# EAGLE board board (EAGLE 9.6.2)
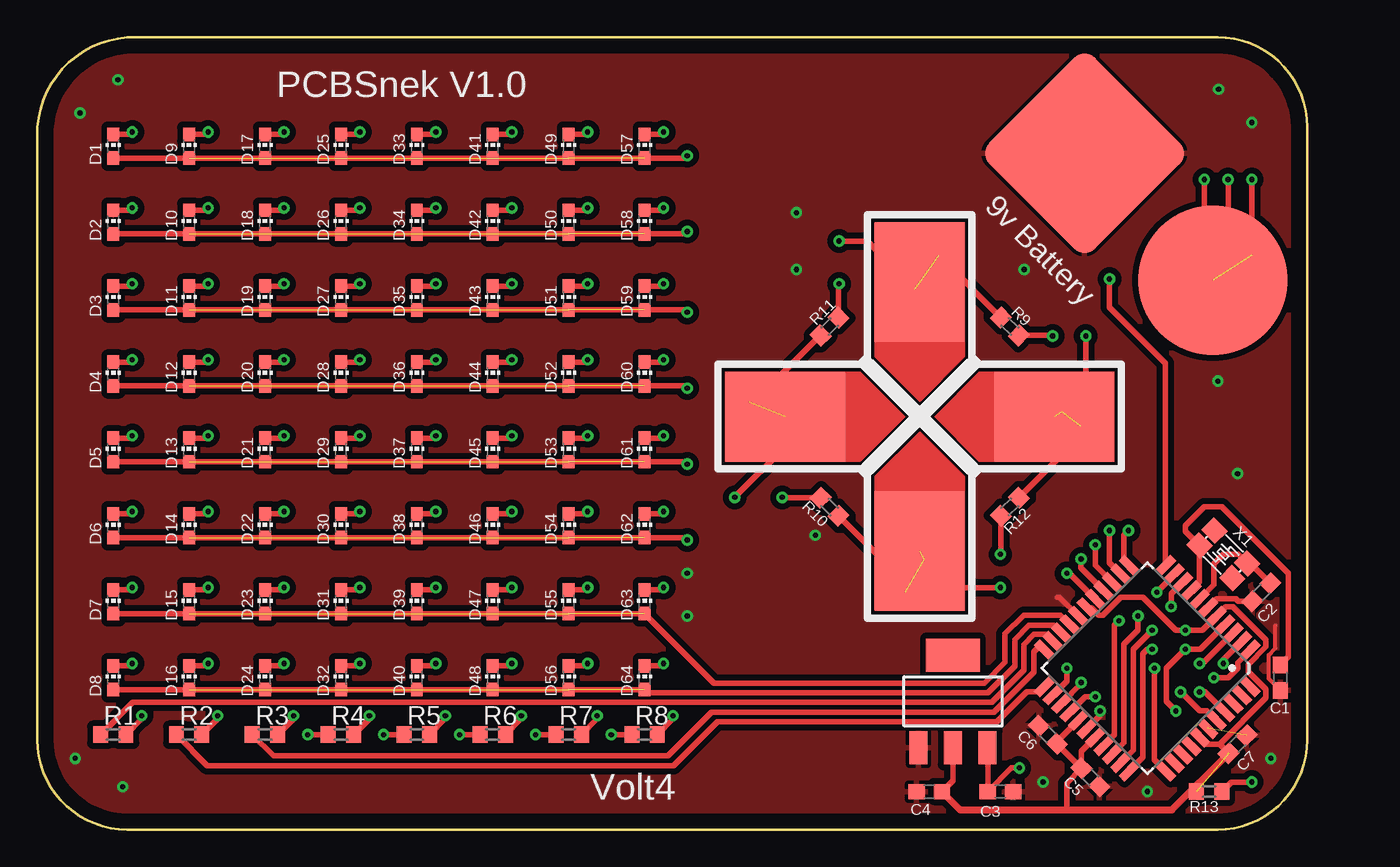
[diagram p0: board, top side]
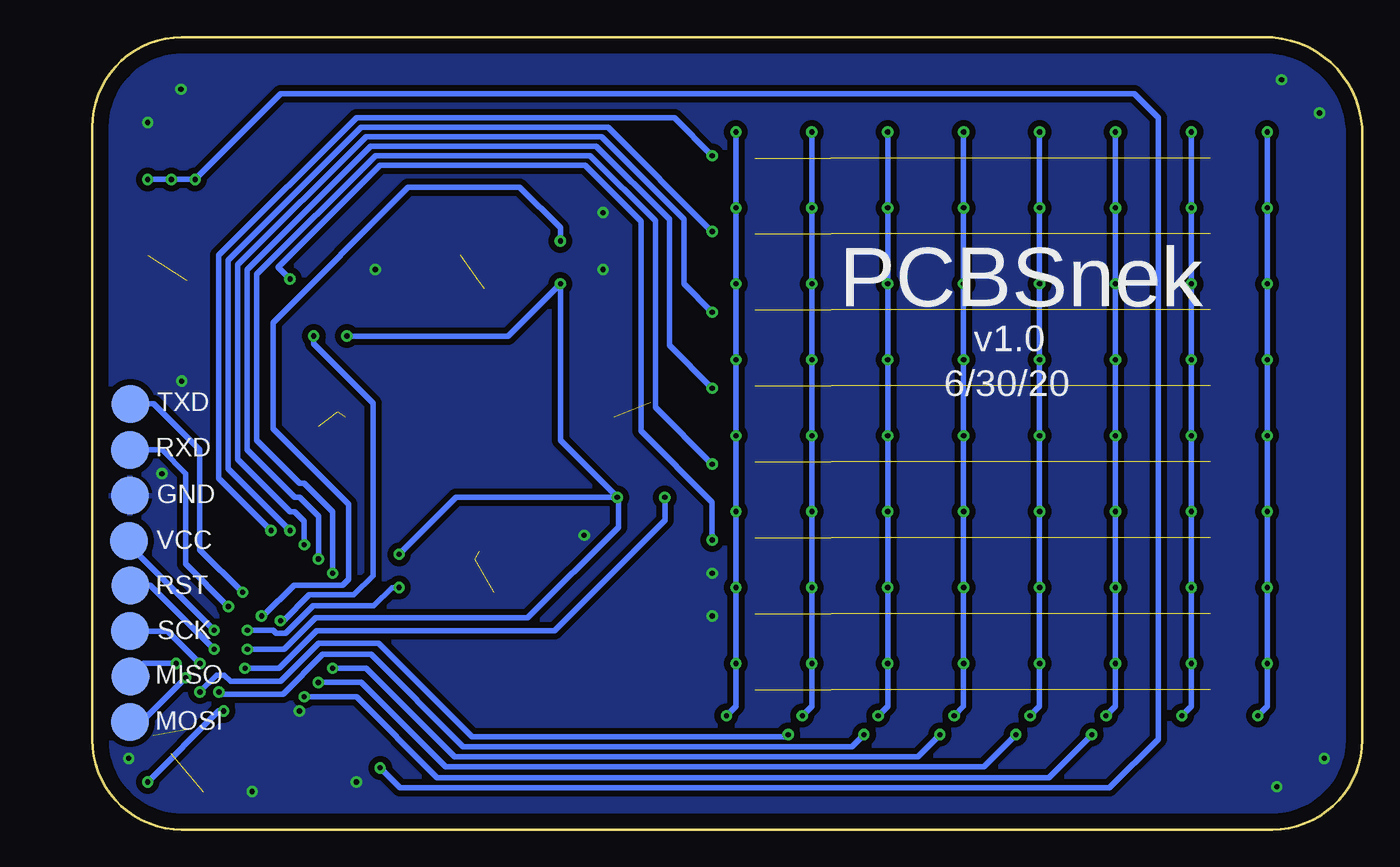
[diagram p1: board, bottom side, seen from below]

Size 85 x 53 mm. Coordinates in mm from the lower left corner, seen from the top.
Outline: 0,6 0,47 arc-81 6,53 79,53 arc-90 85,47 85,6 arc-90 79,0 6,0 arc-90 0,6
Copper layers (1*16): Top 0.035mm / dielectric 1.5mm / Bottom 0.035mm
Design rules "default": minimum track width 6mil, minimum drill 0.35mm, track to track 6mil, track to pad 6mil, pad to pad 6mil, via to via 6mil, smd to smd 6mil, copper to edge 40mil, drill to drill 6mil, minimum pad ring 10mil, minimum via ring 8mil, stop-mask expansion 4mil, vias tented up to drill 0mil, thermal gap 10mil

## Footprints (pad centres in the part's own frame; a part is rotated, then mirrored left to right if it is on the bottom)
SOT223 = smd 1.219 x 2.235: 1 -2.311,-3.099; 2 0,-3.099; 3 2.311,-3.099 | smd 3.6 x 2.2: 4 0,3.099
C0603 = smd 1.1 x 1: 1 -0.85,0; 2 0.85,0
LED_CHIP-LED0603MP = smd 0.8 x 0.9: A 0,-0.794; C 0,0.794
B2,54 = smd 2.54 x 2.54: TP 0,0
QFP44_10X10_0.80 = smd 1.5 x 0.55: 1 -5.7,4; 2 -5.7,3.2; 3 -5.7,2.4; 4 -5.7,1.6; 5 -5.7,0.8; 6 -5.7,0; 7 -5.7,-0.8; 8 -5.7,-1.6; 9 -5.7,-2.4; 10 -5.7,-3.2; 11 -5.7,-4; 23 5.7,-4; 24 5.7,-3.2; 25 5.7,-2.4; 26 5.7,-1.6; 27 5.7,-0.8; 28 5.7,0; 29 5.7,0.8; 30 5.7,1.6; 31 5.7,2.4; 32 5.7,3.2; 33 5.7,4 | smd 0.55 x 1.5: 12 -4,-5.7; 13 -3.2,-5.7; 14 -2.4,-5.7; 15 -1.6,-5.7; 16 -0.8,-5.7; 17 0,-5.7; 18 0.8,-5.7; 19 1.6,-5.7; 20 2.4,-5.7; 21 3.2,-5.7; 22 4,-5.7; 34 4,5.7; 35 3.2,5.7; 36 2.4,5.7; 37 1.6,5.7; 38 0.8,5.7; 39 0,5.7; 40 -0.8,5.7; 41 -1.6,5.7; 42 -2.4,5.7; 43 -3.2,5.7; 44 -4,5.7
R0603 = smd 1 x 1.1: 1 -0.85,0; 2 0.85,0
D-PAD = smd 6 x 8: DOWN 0,-9; UP 0,9 | smd 8 x 6: LEFT -9,0; RIGHT 9,0
BAT = smd 10 x 10: N 12.07,1.07; P 0,1
SMD3225 = smd 1.3 x 1.2: 1 -1.55,-0.7; 2 1.55,-0.7; 3 1.55,0.7; 4 -1.55,0.7

## Placement (x,y rotation side)
5V-REGULATOR  NCP1117ST50T3G  [SOT223]  61.28,8.57 0 top
C1  [C0603]  83.19,10.16 270 top
C2  [C0603]  81.92,15.88 225 top
C3  [C0603]  64.45,2.54 0 top
C4  [C0603]  59.69,2.54 180 top
C5  [C0603]  70.48,3.49 315 top
C6  [C0603]  67.63,6.35 135 top
C7  [C0603]  80.33,5.71 45 top
D1  [LED_CHIP-LED0603MP]  5.08,45.72 0 top
D2  [LED_CHIP-LED0603MP]  5.08,40.64 0 top
D3  [LED_CHIP-LED0603MP]  5.08,35.56 0 top
D4  [LED_CHIP-LED0603MP]  5.08,30.48 0 top
D5  [LED_CHIP-LED0603MP]  5.08,25.4 0 top
D6  [LED_CHIP-LED0603MP]  5.08,20.32 0 top
D7  [LED_CHIP-LED0603MP]  5.08,15.24 0 top
D8  [LED_CHIP-LED0603MP]  5.08,10.16 0 top
D9  [LED_CHIP-LED0603MP]  10.16,45.72 0 top
D10  [LED_CHIP-LED0603MP]  10.16,40.64 0 top
D11  [LED_CHIP-LED0603MP]  10.16,35.56 0 top
D12  [LED_CHIP-LED0603MP]  10.16,30.48 0 top
D13  [LED_CHIP-LED0603MP]  10.16,25.4 0 top
D14  [LED_CHIP-LED0603MP]  10.16,20.32 0 top
D15  [LED_CHIP-LED0603MP]  10.16,15.24 0 top
D16  [LED_CHIP-LED0603MP]  10.16,10.16 0 top
D17  [LED_CHIP-LED0603MP]  15.24,45.72 0 top
D18  [LED_CHIP-LED0603MP]  15.24,40.64 0 top
D19  [LED_CHIP-LED0603MP]  15.24,35.56 0 top
D20  [LED_CHIP-LED0603MP]  15.24,30.48 0 top
D21  [LED_CHIP-LED0603MP]  15.24,25.4 0 top
D22  [LED_CHIP-LED0603MP]  15.24,20.32 0 top
D23  [LED_CHIP-LED0603MP]  15.24,15.24 0 top
D24  [LED_CHIP-LED0603MP]  15.24,10.16 0 top
D25  [LED_CHIP-LED0603MP]  20.32,45.72 0 top
D26  [LED_CHIP-LED0603MP]  20.32,40.64 0 top
D27  [LED_CHIP-LED0603MP]  20.32,35.56 0 top
D28  [LED_CHIP-LED0603MP]  20.32,30.48 0 top
D29  [LED_CHIP-LED0603MP]  20.32,25.4 0 top
D30  [LED_CHIP-LED0603MP]  20.32,20.32 0 top
D31  [LED_CHIP-LED0603MP]  20.32,15.24 0 top
D32  [LED_CHIP-LED0603MP]  20.32,10.16 0 top
D33  [LED_CHIP-LED0603MP]  25.4,45.72 0 top
D34  [LED_CHIP-LED0603MP]  25.4,40.64 0 top
D35  [LED_CHIP-LED0603MP]  25.4,35.56 0 top
D36  [LED_CHIP-LED0603MP]  25.4,30.48 0 top
D37  [LED_CHIP-LED0603MP]  25.4,25.4 0 top
D38  [LED_CHIP-LED0603MP]  25.4,20.32 0 top
D39  [LED_CHIP-LED0603MP]  25.4,15.24 0 top
D40  [LED_CHIP-LED0603MP]  25.4,10.16 0 top
D41  [LED_CHIP-LED0603MP]  30.48,45.72 0 top
D42  [LED_CHIP-LED0603MP]  30.48,40.64 0 top
D43  [LED_CHIP-LED0603MP]  30.48,35.56 0 top
D44  [LED_CHIP-LED0603MP]  30.48,30.48 0 top
D45  [LED_CHIP-LED0603MP]  30.48,25.4 0 top
D46  [LED_CHIP-LED0603MP]  30.48,20.32 0 top
D47  [LED_CHIP-LED0603MP]  30.48,15.24 0 top
D48  [LED_CHIP-LED0603MP]  30.48,10.16 0 top
D49  [LED_CHIP-LED0603MP]  35.56,45.72 0 top
D50  [LED_CHIP-LED0603MP]  35.56,40.64 0 top
D51  [LED_CHIP-LED0603MP]  35.56,35.56 0 top
D52  [LED_CHIP-LED0603MP]  35.56,30.48 0 top
D53  [LED_CHIP-LED0603MP]  35.56,25.4 0 top
D54  [LED_CHIP-LED0603MP]  35.56,20.32 0 top
D55  [LED_CHIP-LED0603MP]  35.56,15.24 0 top
D56  [LED_CHIP-LED0603MP]  35.56,10.16 0 top
D57  [LED_CHIP-LED0603MP]  40.64,45.72 0 top
D58  [LED_CHIP-LED0603MP]  40.64,40.64 0 top
D59  [LED_CHIP-LED0603MP]  40.64,35.56 0 top
D60  [LED_CHIP-LED0603MP]  40.64,30.48 0 top
D61  [LED_CHIP-LED0603MP]  40.64,25.4 0 top
D62  [LED_CHIP-LED0603MP]  40.64,20.32 0 top
D63  [LED_CHIP-LED0603MP]  40.64,15.24 0 top
D64  [LED_CHIP-LED0603MP]  40.64,10.16 0 top
GND  TPB2,54  [B2,54]  82.48,22.34 270 bottom
MICROCONTROLLER  ATMEGA16-16AU  [QFP44_10X10_0.80]  74.3,10.79 225 top
MISO  TPB2,54  [B2,54]  82.43,10.24 270 bottom
MOSI  TPB2,54  [B2,54]  82.48,7.21 270 bottom
R1  [R0603]  5.08,6.35 0 top
R2  [R0603]  10.16,6.35 0 top
R3  [R0603]  15.24,6.35 0 top
R4  [R0603]  20.32,6.35 0 top
R5  [R0603]  25.4,6.35 0 top
R6  [R0603]  30.48,6.35 0 top
R7  [R0603]  35.56,6.35 0 top
R8  [R0603]  40.64,6.35 0 top
R9  [R0603]  65.09,33.66 315 top
R10  [R0603]  53.02,21.59 135 top
R11  [R0603]  53.02,33.66 45 top
R12  [R0603]  65.09,21.59 225 top
R13  [R0603]  78.42,2.54 180 top
RST  TPB2,54  [B2,54]  82.43,16.34 270 bottom
RXD  TPB2,54  [B2,54]  82.48,25.4 270 bottom
SCK  TPB2,54  [B2,54]  82.48,13.27 270 bottom
TOUCH-PAD  DPAD  [D-PAD]  59.05,27.62 0 top
TXD  TPB2,54  [B2,54]  82.44,28.48 270 bottom
U$1  BAT  [BAT]  79.38,37.47 135 top
VCC  TPB2,54  [B2,54]  82.53,19.32 270 bottom
X1  X322516MLB4SI  [SMD3225]  79.38,18.41 315 top

## Library data of the parts
5V-REGULATOR = NCP1117ST50T3G; AVAILABILITY: Good; DESCRIPTION: 1.0 A Positive LDO Linear Voltage Regulator (Fixed and Adjustable) Vout: 5.0 V; MF: ON Semiconductor; MP: NCP1117ST50T3G; PACKAGE: TO-261-4 ON Semiconductor; PRICE: 0.22 USD
C1-C7 = rcl; SPICEPREFIX: C
D1-D64 = 52101-101-REV-A
GND MISO MOSI RST RXD SCK TXD VCC = testpad
MICROCONTROLLER = atmel
R1-R13 = rcl; SPICEPREFIX: R
TOUCH-PAD = dpad
U$1 = 9vbat
X1 = X322516MLB4SI; AVAILABILITY: Unavailable; DESCRIPTION: External dimensions: 3.2 x 2.5 x 0.8 mm. Frequency range: 11.0592MHz ~54MHz; MF: YXC; MP: X322516MLB4SI; PACKAGE: Package; PRICE: None

## Nets
D2: D6.A D14.A D22.A D30.A D38.A D46.A D54.A D62.A MICROCONTROLLER.11
D3: D1.A D9.A D17.A D25.A D33.A D41.A D49.A D57.A MICROCONTROLLER.12
D4: MICROCONTROLLER.40 R7.1
D5: MICROCONTROLLER.41 R8.1
D8: D3.A D11.A D19.A D27.A D35.A D43.A D51.A D59.A MICROCONTROLLER.14
D9: D4.A D12.A D20.A D28.A D36.A D44.A D52.A D60.A MICROCONTROLLER.15
D14: MICROCONTROLLER.30 R12.1 TOUCH-PAD.RIGHT
D15: MICROCONTROLLER.31 R9.1 TOUCH-PAD.UP
D16: MICROCONTROLLER.32 R10.1 TOUCH-PAD.DOWN
D17: MICROCONTROLLER.33 R9.2 R10.2 R11.2 R12.2
D18: MICROCONTROLLER.34 R11.1 TOUCH-PAD.LEFT
D22: D7.A D15.A D23.A D31.A D39.A D47.A D55.A D63.A MICROCONTROLLER.19
D23: D8.A D16.A D24.A D32.A D40.A D48.A D56.A D64.A MICROCONTROLLER.20
D24: MICROCONTROLLER.21 R1.1
D25: MICROCONTROLLER.22 R3.1
D26: MICROCONTROLLER.23 R2.1
D27: MICROCONTROLLER.24 R6.1
D28: MICROCONTROLLER.25 R5.1
D29: MICROCONTROLLER.26 R4.1
D30: D2.A D10.A D18.A D26.A D34.A D42.A D50.A D58.A MICROCONTROLLER.13
D31: D5.A D13.A D21.A D29.A D37.A D45.A D53.A D61.A MICROCONTROLLER.16
GND: 5V-REGULATOR.1 C1.2 C2.2 C3.2 C4.2 C5.2 C6.2 C7.2 GND.TP MICROCONTROLLER.6 MICROCONTROLLER.18 MICROCONTROLLER.28 MICROCONTROLLER.39 U$1.N
MISO: MICROCONTROLLER.2 MISO.TP
MOSI: MICROCONTROLLER.1 MOSI.TP
N$1: D1.C D2.C D3.C D4.C D5.C D6.C D7.C D8.C R1.2
N$2: D9.C D10.C D11.C D12.C D13.C D14.C D15.C D16.C R2.2
N$3: D17.C D18.C D19.C D20.C D21.C D22.C D23.C D24.C R3.2
N$4: D25.C D26.C D27.C D28.C D29.C D30.C D31.C D32.C R4.2
N$5: D33.C D34.C D35.C D36.C D37.C D38.C D39.C D40.C R5.2
N$6: D41.C D42.C D43.C D44.C D45.C D46.C D47.C D48.C R6.2
N$7: D49.C D50.C D51.C D52.C D53.C D54.C D55.C D56.C R7.2
N$8: D57.C D58.C D59.C D60.C D61.C D62.C D63.C D64.C R8.2
RESET: MICROCONTROLLER.4 R13.1 RST.TP
RXD: MICROCONTROLLER.9 RXD.TP
SCK: MICROCONTROLLER.3 SCK.TP
TXD: MICROCONTROLLER.10 TXD.TP
VCC: 5V-REGULATOR.2 C4.1 C5.1 C6.1 C7.1 MICROCONTROLLER.5 MICROCONTROLLER.17 MICROCONTROLLER.27 MICROCONTROLLER.29 MICROCONTROLLER.38 R13.2 VCC.TP
VIN: 5V-REGULATOR.3 C3.1 U$1.P
XTAL1: C1.1 MICROCONTROLLER.8 X1.1
XTAL2: C2.1 MICROCONTROLLER.7 X1.3

## Tracks (layer width: path | path; a pad name or v marks a point on that pad's centre or on a via)
D2  (via drill 0.35)  (6 unrouted)
  Top 0.356: D6.A D62.A 43.34,19.53 v43.5,19.37 | MICROCONTROLLER.11 75.5,31.19 71.75,34.93 v71.75,36.83
  Bottom 0.356: v71.75,36.83 72.55,37.62 65.72,44.45 52.02,44.45 48.26,40.69 48.26,26.67 43.5,21.91 v43.5,19.37
D3  (via drill 0.35)  (6 unrouted)
  Top 0.356: D1.A D57.A 43.34,44.93 v43.5,45.09 | MICROCONTROLLER.12 72.71,18.04 72.71,19.68 v73.03,20
  Bottom 0.356: v73.03,20 76.52,23.5 76.52,38.42 67.31,47.62 46.04,47.62 v43.5,45.09
D4  (via drill 0.35)
  Top 0.356: R7.1 v33.34,6.35 | MICROCONTROLLER.40 78.28,7.94 77.79,7.94 v76.52,9.21
  Bottom 0.356: v33.34,6.35 34.14,5.55 60.16,5.55 66.33,11.72 69.56,11.72 72.21,9.07 76.38,9.07 v76.52,9.21
D5  (via drill 0.35)
  Top 0.356: R8.1 v38.42,6.35 | MICROCONTROLLER.41 78.14,9.21 v77.79,9.21
  Bottom 0.356: v38.42,6.35 38.54,6.22 59.56,6.22 65.81,12.47 69.83,12.47 72.39,9.91 75.74,9.91 76.17,10.34 76.66,10.34 v77.79,9.21
D8  (via drill 0.35)  (6 unrouted)
  Top 0.356: D3.A D59.A 43.34,34.77 v43.5,34.61 | MICROCONTROLLER.14 70.8,17.68 v70.8,19.05
  Bottom 0.356: v70.8,19.05 70.8,20.64 71.44,21.27 71.75,21.27 75.25,24.77 75.25,37.78 66.67,46.35 50.91,46.35 45.4,40.84 45.4,36.51 v43.5,34.61
D9  (via drill 0.35)  (6 unrouted)
  Top 0.356: D4.A D60.A 43.34,29.69 v43.5,29.53 | MICROCONTROLLER.15 69.85,17.5 v69.85,18.1
  Bottom 0.356: v69.85,18.1 69.85,20.95 71.12,22.23 71.44,22.23 74.61,25.4 74.61,37.47 66.36,45.72 51.26,45.72 46.35,40.82 46.35,32.38 v43.5,29.53
D14  (via drill 0.35)  (2 unrouted)
  Top 0.356: MICROCONTROLLER.30 71.4,5.67 72.07,6.35 72.07,13.65 v72.39,13.97 | R12.1 69.85,26.35 69.85,26.99 | v70.17,33.02 70.17,29.53 68.58,27.94
  Bottom 0.356: v72.39,13.97 72.19,13.97 70.46,15.7 67.49,15.7 66.19,16.99 66.19,28.54 70.17,32.51 v70.17,33.02
D15  (via drill 0.35)  (2 unrouted)
  Top 0.356: 72.45,5.56 MICROCONTROLLER.31 72.71,5.81 72.71,12.38 73.66,13.34 v73.66,14.29 | R9.1 60.33,38.42 | 60.33,38.42 | v53.66,39.37 55.56,39.37 58.74,36.2
  Bottom 0.356: v73.66,14.29 73.56,14.29 71.49,16.36 68.22,16.36 67.84,16.74 67.84,21.77 72.9,26.82 72.9,33.92 63.86,42.96 56.38,42.96 53.66,40.25 v53.66,39.37
D16  (via drill 0.35)  (2 unrouted)
  Top 0.356: MICROCONTROLLER.32 73.34,5.32 73.34,12.06 v74.61,13.34 | R10.1 58.1,16.51 58.1,15.88 | v64.45,16.19 61.28,16.19 59.37,18.1
  Bottom 0.356: v74.61,13.34 72.9,13.34 72.69,13.13 72.03,13.13 70.21,14.96 66.17,14.96 64.94,16.19 v64.45,16.19
D17  (via drill 0.35)
  Top 0.356: MICROCONTROLLER.33 73.98,4.82 73.98,11.75 74.3,12.06 v74.61,12.06 | R11.2 53.62,36.48 v53.66,36.51 | R9.2 67.91,33.05 v67.94,33.02 | R12.2 64.49,18.45 v64.45,18.41 | R10.2 49.88,22.19 v49.85,22.23
  Bottom 0.356: v74.61,12.06 72.16,12.06 70.05,14.17 55.84,14.17 49.78,20.23 49.78,22.16 v49.85,22.23 | v67.94,33.02 57.15,33.02 v53.66,36.51 53.66,26.04 v49.85,22.23 | v64.45,18.41 60.64,22.23 v49.85,22.23
D18  (via drill 0.35)  (1 unrouted)
  Top 0.356: MICROCONTROLLER.34 74.77,4.67 v74.77,10.79 | R11.1 47.94,28.57 47.62,28.57 | v46.67,22.23 50.05,25.61 TOUCH-PAD.LEFT
  Bottom 0.356: v74.77,10.79 72.49,10.79 69.98,13.31 54.05,13.31 46.67,20.69 v46.67,22.23
D22  (6 unrouted)
  Top 0.356: D7.A D63.A 45.28,9.8 63.37,9.8 64.77,11.2 64.77,13.11 66.02,14.35 68.48,14.35 MICROCONTROLLER.19
D23  (6 unrouted)
  Top 0.356: D8.A D64.A 40.87,9.14 63.62,9.14 65.42,10.94 65.42,12.71 66.36,13.65 68.04,13.65 MICROCONTROLLER.20
D24
  Top 0.356: MICROCONTROLLER.21 67.73,12.84 67.73,12.88 67.55,13.05 66.71,13.05 66.03,12.37 66.03,10.65 63.89,8.51 6.39,8.51 R1.1
D25
  Top 0.356: MICROCONTROLLER.22 67.12,12.31 66.69,11.88 66.69,10.51 64.03,7.86 45.12,7.86 42.2,4.94 15.8,4.94 R3.1
D26
  Top 0.356: MICROCONTROLLER.23 67.05,9.21 66.24,9.21 64.23,7.2 45.51,7.2 | 45.54,7.23 45.51,7.2 | 45.51,7.2 42.59,4.28 11.38,4.28 R2.1
D27  (via drill 0.35)
  Top 0.356: MICROCONTROLLER.24 68.9,9.92 v68.9,10.79 | v28.26,6.35 R6.1
  Bottom 0.356: v68.9,10.79 66.67,10.79 60.76,4.88 29.73,4.88 v28.26,6.35
D28  (via drill 0.35)
  Top 0.356: R5.1 v23.18,6.35 | MICROCONTROLLER.25 69.85,9.74 v69.85,9.84
  Bottom 0.356: v69.85,9.84 66.99,9.84 61.35,4.2 25.32,4.2 v23.18,6.35
D29  (via drill 0.35)
  Top 0.356: MICROCONTROLLER.26 70.13,8.89 v70.8,8.89 | v18.1,6.35 R4.1
  Bottom 0.356: v70.8,8.89 67.31,8.89 61.9,3.48 20.97,3.48 v18.1,6.35
D30  (via drill 0.35)  (6 unrouted)
  Top 0.356: D2.A D58.A 43.34,39.85 v43.5,40.01 | MICROCONTROLLER.13 71.75,17.86 v71.75,20
  Bottom 0.356: v71.75,20 75.88,24.13 75.88,38.1 66.99,46.99 50.48,46.99 v43.5,40.01
D31  (via drill 0.35)  (6 unrouted)
  Top 0.356: D5.A D61.A 43.34,24.61 v43.5,24.45 | MICROCONTROLLER.16 69.08,17.14 v68.9,17.14
  Bottom 0.356: v68.9,17.14 68.9,21.27 70.8,23.18 71.12,23.18 73.98,26.04 73.98,37.15 66.04,45.09 51.66,45.09 47.31,40.73 47.31,28.26 v43.5,24.45
GND  (via drill 0.35)  (1 unrouted)
  Top 0.254: 82.87,13.65 82.87,12.14 82.41,11.68 82.41,10.09 C1.2
  Top 0.356: MICROCONTROLLER.28 71.12,7.62 v71.12,7.94 | MICROCONTROLLER.18 68.4,15.56 68.26,15.56 | C2.2 80.38,15.27 80.22,15.43 78.93,15.43 MICROCONTROLLER.6
  other vias: 2.54,4.76 5.4,50.16 79.06,49.53 81.28,47.31 2.86,47.94 5.71,2.86 50.8,41.27 50.8,37.47 66.04,37.47 43.5,17.14 43.5,14.29 67.31,3.17 74.3,2.54 82.55,4.76 80.33,23.81 52.07,19.68 79,30
  pour Top (isolate 0.406): 5.08,65.41 -9.53,50.8 -9.53,8.89 7.94,-8.57 87.63,-8.57 90.81,-5.4 90.81,78.11 78.11,65.41
  pour Bottom (isolate 0.406): 3.17,64.14 -9.84,51.12 -9.84,9.84 8.57,-8.57 80.33,-8.57 90.49,1.59 90.49,59.37 85.72,64.14
MISO  (via drill 0.35)
  Top 0.356: v79.38,11.11 79.38,11.35 MICROCONTROLLER.2
  Bottom 0.356: v79.38,11.11 81.56,11.11 MISO.TP
MOSI  (via drill 0.35)
  Top 0.356: v78.74,10.16 79.69,10.16 80.33,10.79 80.33,11.17 MICROCONTROLLER.1
  Bottom 0.356: v78.74,10.16 81.69,7.21 MOSI.TP
N$1  (via drill 0.35)
  Top 0.152: D2.C 5.08,41.02
  Top 0.356: D1.C 6.19,46.51 v6.35,46.67 | D2.C 6.19,41.43 v6.35,41.59 | D3.C 6.19,36.35 v6.35,36.51 | D5.C 6.19,26.19 v6.35,26.35 | D6.C 6.19,21.11 v6.35,21.27 | D7.C 6.19,16.03 v6.35,16.19 | D8.C 6.19,10.95 v6.35,11.11 | R1.2 6.99,7.41 v6.99,7.62 | D4.C 6.19,31.27 v6.35,31.43
  Bottom 0.356: v6.35,46.67 v6.35,41.59 v6.35,36.51 v6.35,31.43 v6.35,26.35 v6.35,21.27 v6.35,16.19 v6.35,11.11 6.35,8.26 v6.99,7.62
N$2  (via drill 0.35)
  Top 0.356: R2.2 12.06,7.41 v12.06,7.62 | D16.C 11.27,10.95 v11.43,11.11 | D15.C 11.27,16.03 v11.43,16.19 | D14.C 11.27,21.11 v11.43,21.27 | D13.C 11.27,26.19 v11.43,26.35 | D12.C 11.27,31.27 v11.43,31.43 | D11.C 11.27,36.35 v11.43,36.51 | D10.C 11.27,41.43 v11.43,41.59 | D9.C 11.27,46.51 v11.43,46.67
  Bottom 0.356: v11.43,46.67 v11.43,41.59 v11.43,36.51 v11.43,31.43 v11.43,26.35 v11.43,21.27 11.43,20.95 v11.43,16.19 v11.43,11.11 11.43,8.26 v12.06,7.62
N$3  (via drill 0.35)
  Top 0.356: D17.C 16.35,46.51 v16.51,46.67 | D18.C 16.35,41.43 v16.51,41.59 | D19.C 16.35,36.35 v16.51,36.51 | D20.C 16.35,31.27 v16.51,31.43 | D21.C 16.35,26.19 v16.51,26.35 | D22.C 16.35,21.11 v16.51,21.27 | D23.C 16.35,16.03 v16.51,16.19 | D24.C 16.35,10.95 v16.51,11.11 | R3.2 17.14,7.41 v17.14,7.62
  Bottom 0.356: v16.51,46.67 v16.51,41.59 v16.51,36.51 v16.51,31.43 v16.51,26.35 v16.51,21.27 v16.51,16.19 v16.51,11.11 16.51,8.26 v17.14,7.62
N$4  (via drill 0.35)
  Top 0.356: D25.C 21.43,46.51 v21.59,46.67 | D26.C 21.43,41.43 v21.59,41.59 | D27.C 21.43,36.35 v21.59,36.51 | D28.C 21.43,31.27 v21.59,31.43 | D29.C 21.43,26.19 v21.59,26.35 | D30.C 21.43,21.11 v21.59,21.27 | D31.C 21.43,16.03 v21.59,16.19 | D32.C 21.43,10.95 v21.59,11.11 | R4.2 22.23,7.41 v22.23,7.62
  Bottom 0.356: v21.59,46.67 v21.59,41.59 v21.59,36.51 v21.59,31.43 v21.59,26.35 v21.59,21.27 21.59,20.95 v21.59,16.19 v21.59,11.11 21.59,8.26 v22.23,7.62
N$5  (via drill 0.35)
  Top 0.356: D33.C 26.51,46.51 v26.67,46.67 | D34.C 26.51,41.43 v26.67,41.59 | D35.C 26.51,36.35 v26.67,36.51 | D36.C 26.51,31.27 v26.67,31.43 | D37.C 26.51,26.19 v26.67,26.35 | D38.C 26.51,21.11 v26.67,21.27 | D39.C 26.51,16.03 v26.67,16.19 | D40.C 26.51,10.95 v26.67,11.11 | R5.2 27.3,7.41 v27.3,7.62
  Bottom 0.356: v26.67,46.67 v26.67,41.59 v26.67,36.51 v26.67,31.43 v26.67,26.35 v26.67,21.27 v26.67,16.19 v26.67,11.11 26.67,10.79 26.67,8.26 v27.3,7.62
N$6  (via drill 0.35)
  Top 0.356: D41.C 31.59,46.51 v31.75,46.67 | D42.C 31.59,41.43 v31.75,41.59 | D43.C 31.59,36.35 v31.75,36.51 | D44.C 31.59,31.27 v31.75,31.43 | D45.C 31.59,26.19 v31.75,26.35 | D46.C 31.59,21.11 v31.75,21.27 | D47.C 31.59,16.03 v31.75,16.19 | D48.C 31.59,10.95 v31.75,11.11 | R6.2 32.38,7.41 v32.38,7.62
  Bottom 0.356: v31.75,46.67 v31.75,41.59 v31.75,36.51 v31.75,31.43 v31.75,26.35 v31.75,21.27 v31.75,16.19 31.75,15.88 v31.75,11.11 31.75,8.26 v32.38,7.62
N$7  (via drill 0.35)
  Top 0.356: D49.C 36.67,46.51 v36.83,46.67 | D50.C 36.67,41.43 v36.83,41.59 | D51.C 36.67,36.35 v36.83,36.51 | D52.C 36.67,31.27 v36.83,31.43 | D53.C 36.67,26.19 v36.83,26.35 | D54.C 36.67,21.11 v36.83,21.27 | D55.C 36.67,16.03 v36.83,16.19 | D56.C 36.67,10.95 v36.83,11.11 | R7.2 37.47,7.41 v37.47,7.62
  Bottom 0.356: v36.83,46.67 v36.83,41.59 v36.83,36.51 v36.83,31.43 v36.83,26.35 v36.83,21.27 v36.83,16.19 v36.83,11.11 36.83,10.79 36.83,8.26 v37.47,7.62
N$8  (via drill 0.35)
  Top 0.356: D57.C 41.75,46.51 v41.91,46.67 | D58.C 41.75,41.43 v41.91,41.59 | D59.C 41.75,36.35 v41.91,36.51 | D60.C 41.75,31.27 v41.91,31.43 | D61.C 41.75,26.19 v41.91,26.35 | D62.C 41.75,21.11 v41.91,21.27 | D63.C 41.75,16.03 v41.91,16.19 | D64.C 41.75,10.95 v41.91,11.11 | R8.2 42.55,7.41 v42.55,7.62
  Bottom 0.356: v41.91,46.67 v41.91,41.59 v41.91,36.51 v41.91,31.43 v41.91,26.35 v41.91,21.27 41.91,20.95 v41.91,16.19 v41.91,11.11 41.91,8.26 v42.55,7.62
RESET  (via drill 0.35)
  Top 0.356: MICROCONTROLLER.4 77.83,12.06 v76.83,12.06 75.56,10.79 75.56,8.57 v76.2,7.94 | R13.1 79.91,3.17 v81.28,3.17
  Bottom 0.356: v76.83,12.06 81.11,16.34 RST.TP | v81.28,3.17 76.52,7.94 v76.2,7.94
RXD  (via drill 0.35)
  Top 0.356: MICROCONTROLLER.9 75.88,15.78 v75.88,14.92
  Bottom 0.356: v75.88,14.92 78.74,17.78 78.74,23.81 80.32,25.39 RXD.TP
SCK  (via drill 0.35)
  Top 0.356: v77.79,11.11 78.01,11.11 MICROCONTROLLER.3
  Bottom 0.356: v77.79,11.11 79.95,13.27 SCK.TP
TXD  (via drill 0.35)
  Top 0.356: MICROCONTROLLER.10 76.06,17.01 v74.93,15.88
  Bottom 0.356: v74.93,15.88 77.79,18.73 77.79,25.4 80.87,28.48 TXD.TP
VCC  (via drill 0.35)  (1 unrouted)
  Top 0.356: 69.7,7.22 MICROCONTROLLER.27 68.23,5.86 C6.1 C5.1 | 79.13,5.71 C7.1 | 79.13,5.71 82.23,8.81 82.21,8.84 82.21,9.39 81.04,10.56 81.04,11.03 82.23,12.22 82.23,12.7 80.01,14.92 79.55,14.92 MICROCONTROLLER.5 77.97,13.34 v76.83,13.34 76.2,13.34 73.98,15.56 72.52,15.56 71.3,14.34 71.03,14.34 70.54,14.83 MICROCONTROLLER.17 70.31,14.83 | 60.92,5.44 61.24,5.44 5V-REGULATOR.2 61.28,3.28 C4.1 | 79.13,5.71 78.25,5.71 MICROCONTROLLER.38 77.76,6.38 77.47,6.67 | MICROCONTROLLER.29 69.88,5.25 C5.1 | C5.1 68.9,3.11 68.9,1.32
  Top 0.457: C4.1 61.76,1.32 68.9,1.32 75.93,1.32 C7.1
  Bottom 0.356: VCC.TP 82.53,19.03 v76.83,13.34
VIN  (via drill 0.35)  (1 unrouted)
  Top 0.356: 5V-REGULATOR.3 63.6,5.46 C3.1 65.19,4.13 v65.72,4.13 | v78.11,43.5 78.11,38.1 79.69,39.69 v79.69,43.5 | v81.28,43.5 81.28,38.42
  Bottom 0.356: v65.72,4.13 64.38,2.78 16.9,2.78 13.65,6.03 13.65,47.62 15.24,49.21 72.39,49.21 v78.11,43.5 v81.28,43.5
XTAL1
  Top 0.254: 77.78,18.41 X1.1
  Top 0.356: MICROCONTROLLER.8 77.78,16.55 77.78,18.41 | X1.1 76.83,19.96 76.83,20.32 78.11,21.59 79.28,21.59 83.73,17.14 83.73,11.55 C1.1
XTAL2
  Top 0.254: 78.74,16.37 78.74,16.51 | 80.82,17.96 X1.3
  Top 0.356: MICROCONTROLLER.7 78.74,16.37 | 78.74,16.51 78.74,17.78 79.38,18.41 80.36,18.41 80.82,17.96 | X1.3 81.18,17.81 C2.1

## Text on the board
tPlace: PCBSnek V1.0 | 9v Battery | Volt4
bPlace: PCBSnek | v1.0 | 6/30/20